# Altium PCB Tray5.PcbDoc
Units mm, origin at the board's own origin, x right, y up, seen from the top; angles counter-clockwise.
Board outline 187 x 38 mm, 2 copper layers (Top Layer, Bottom Layer); 4 components, 0 nets, 47 pads, 0 vias.
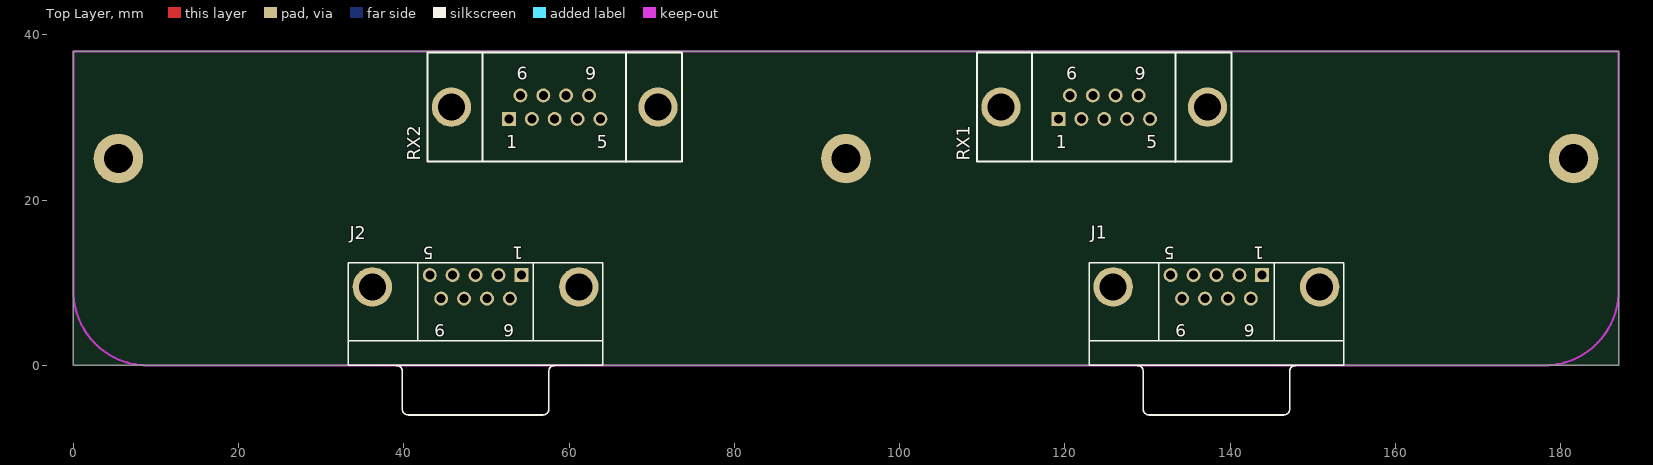
[diagram p0: Top Layer view]
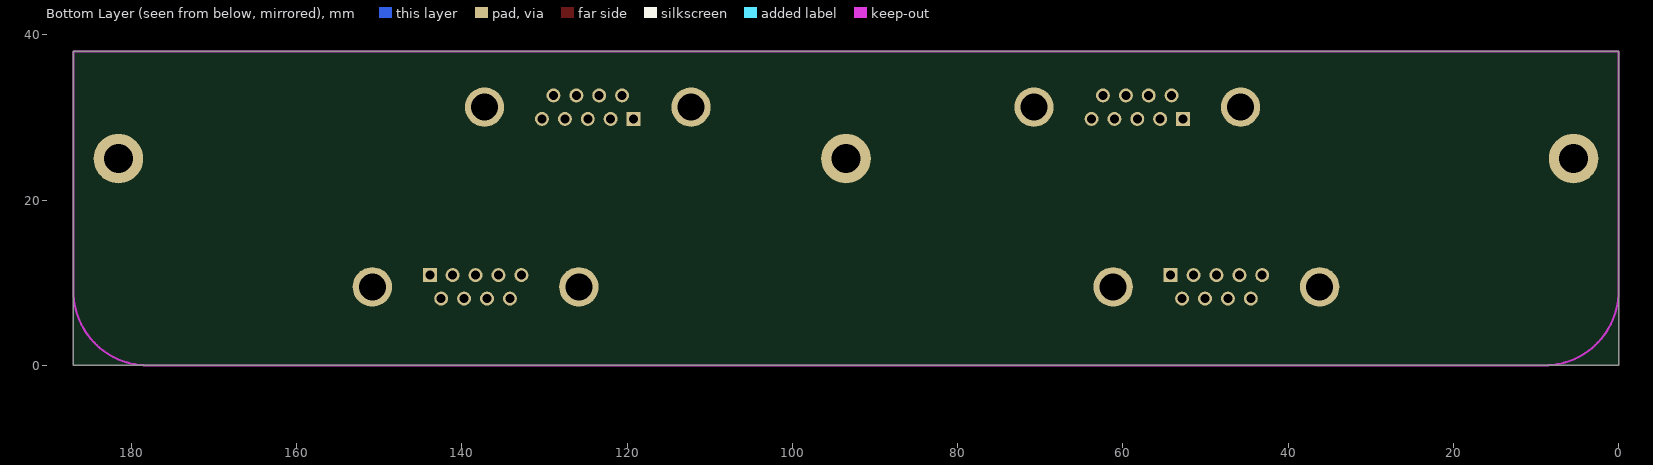
[diagram p1: Bottom Layer view, seen from below]

## Layer stack, top to bottom
Top Layer: signal copper 0.0356
Dielectric: dielectric 0.32, FR-4, Dk 4.8
Bottom Layer: signal copper 0.0356

## Board outline
0,0 0,38 187,38 187,0

## Design rules (kind name [scope] priority, off if disabled: settings)
Clearance [All] p1: gap=0.254
PolygonConnect [All] p1: connectstyle=Relief reliefconductorwidth=0.254 reliefentries=4 polygonreliefangle="90 Angle"
RoutingVias [All] p1: holewidth=0.711 width=1.27 viastyle="Through Hole" minholewidth=0.711 minwidth=1.27 maxholewidth=0.711 maxwidth=1.27
SilkscreenOverComponentPads [All] p1: minsilkscreentomaskgap=0.254
SolderMaskExpansion [All] p1: expansion=0.102
Width [All] p1: maxlimit=0.254 minlimit=0.254 preferedwidth=0.254
27 further rules are at their usual default settings.

## Components (designator, comment, footprint, x,y, rotation, side; value= is the part's Value field where it differs from the comment)
J1 "D Connector 9" DSUB1.385-2H9 138.33,0 r180 top (schematic designator J2)
J2 "D Connector 9" DSUB1.385-2H9 48.67,0 r180 top
RX1 "D Connector 9" "DSUB Upright" 124.75,31.25 r180 top
RX2 "D Connector 9" "DSUB Upright" 58.25,31.25 r180 top

## Footprints (in the part's own frame and the unit in brackets; to place one, negate y for a bottom-side part, rotate by r counter-clockwise, add the part's x,y. Pads: shape width x height; smd on the part's side, far side on the other; paste and mask are expansions set on the pad)
DSUB1.385-2H9 [mm] "Connector; D Subminiature; 9 Position; Right Angle; Pitch 1.385 mm"
  rect 1.69x1.69 hole 1.09: 1(-5.54,-10.92)
  round 1.69 hole 1.09: 2(-2.77,-10.92) 3(0,-10.92) 4(2.77,-10.92) 5(5.54,-10.92) 6(-4.155,-8.08) 7(-1.385,-8.08) 8(1.385,-8.08) 9(4.155,-8.08)
  round 4.76 hole 3.26: 10(-12.495,-9.5) 11(12.495,-9.5)
  silkscreen extent -15.4,-12.4 15.4,6
"DSUB Upright" [mm] "171-009-213R911"
  rect 1.69x1.69 hole 1.09: 1(5.54,1.42)
  round 1.69 hole 1.09: 2(2.77,1.42) 3(0,1.42) 4(-2.77,1.42) 5(-5.54,1.42) 6(4.153,-1.42) 7(1.384,-1.42) 8(-1.384,-1.42) 9(-4.153,-1.42)
  round 4.76 hole 3.26: 10(12.5,0) 11(-12.5,0)
  silkscreen extent -15.4,-6.6 15.4,6.6

## Part data
J1 J2 RX1 RX2: "Receptacle Assembly, 9 Position, Right Angle"

## Free pads (board coordinates)
  round 6 hole 3.5: 0(5.45,25.02) 0(93.5,25.02) 0(181.55,25.02)

## Nets (pads, with @x,y where several pads share a name; then routed paths per layer and width w, separated by ;. In a path a pad name is that pad's centre, name@x,y a point inside that pad or via, vN(x,y) a via of type N, cw(c..) or ccw(c..) an arc to the next point about the centre after c; other vN are vias at no path point)
pads on no net: J1.1 J1.2 J1.3 J1.4 J1.5 J1.6 J1.7 J1.8 J1.9 J1.10 J1.11 J2.1 J2.2 J2.3 J2.4 J2.5 J2.6 J2.7 J2.8 J2.9 J2.10 J2.11 RX1.1 RX1.2 RX1.3 RX1.4 RX1.5 RX1.6 RX1.7 RX1.8 RX1.9 RX1.10 RX1.11 RX2.1 RX2.2 RX2.3 RX2.4 RX2.5 RX2.6 RX2.7 RX2.8 RX2.9 RX2.10 RX2.11

## Keep-outs
Keep-Out Layer:
  lines w0.254: 0,9 ccw(c9,9) 9,0 178,0 ccw(c178,9) 187,9 187,38 0,38 0,9

## Silkscreen, mask and mechanical layers (free items; w line width, h text height)
Mechanical 1:
  lines w0.254: 0,9 ccw(c9,9) 9,0 178,0 ccw(c178,9) 187,9 187,38 0,38 0,9

## Text inside footprints (layer, text, board x,y; h text height)
J1: Top Overlay "1" at 144.12,14.375 h1.5 r180; Top Overlay "5" at 133.29,14.375 h1.5 r180; Top Overlay "9" at 134.675,4.975 h1.5 r180; Top Overlay "6" at 142.985,4.975 h1.5 r180
J2: Top Overlay "1" at 54.46,14.375 h1.5 r180; Top Overlay "5" at 43.63,14.375 h1.5 r180; Top Overlay "9" at 45.015,4.975 h1.5 r180; Top Overlay "6" at 53.325,4.975 h1.5 r180
RX1: Top Overlay "9" at 128.433,34.552 h1.52; Top Overlay "6" at 120.178,34.552 h1.52; Top Overlay "5" at 129.83,26.297 h1.52; Top Overlay "1" at 118.908,26.297 h1.52
RX2: Top Overlay "9" at 61.933,34.552 h1.52; Top Overlay "6" at 53.678,34.552 h1.52; Top Overlay "5" at 63.33,26.297 h1.52; Top Overlay "1" at 52.408,26.297 h1.52